# Altium PCB Main_2022-10-17.pcbdoc (part 1 of 2)
Units mil, origin at the board's own origin, x right, y up, seen from the top; angles counter-clockwise.
Board outline 1653.5 x 1653.5 mil, 4 copper layers (Top Layer, Mid-Layer 1, Mid-Layer 2, Bottom Layer); 65 components, 57 nets, 222 pads, 194 vias.
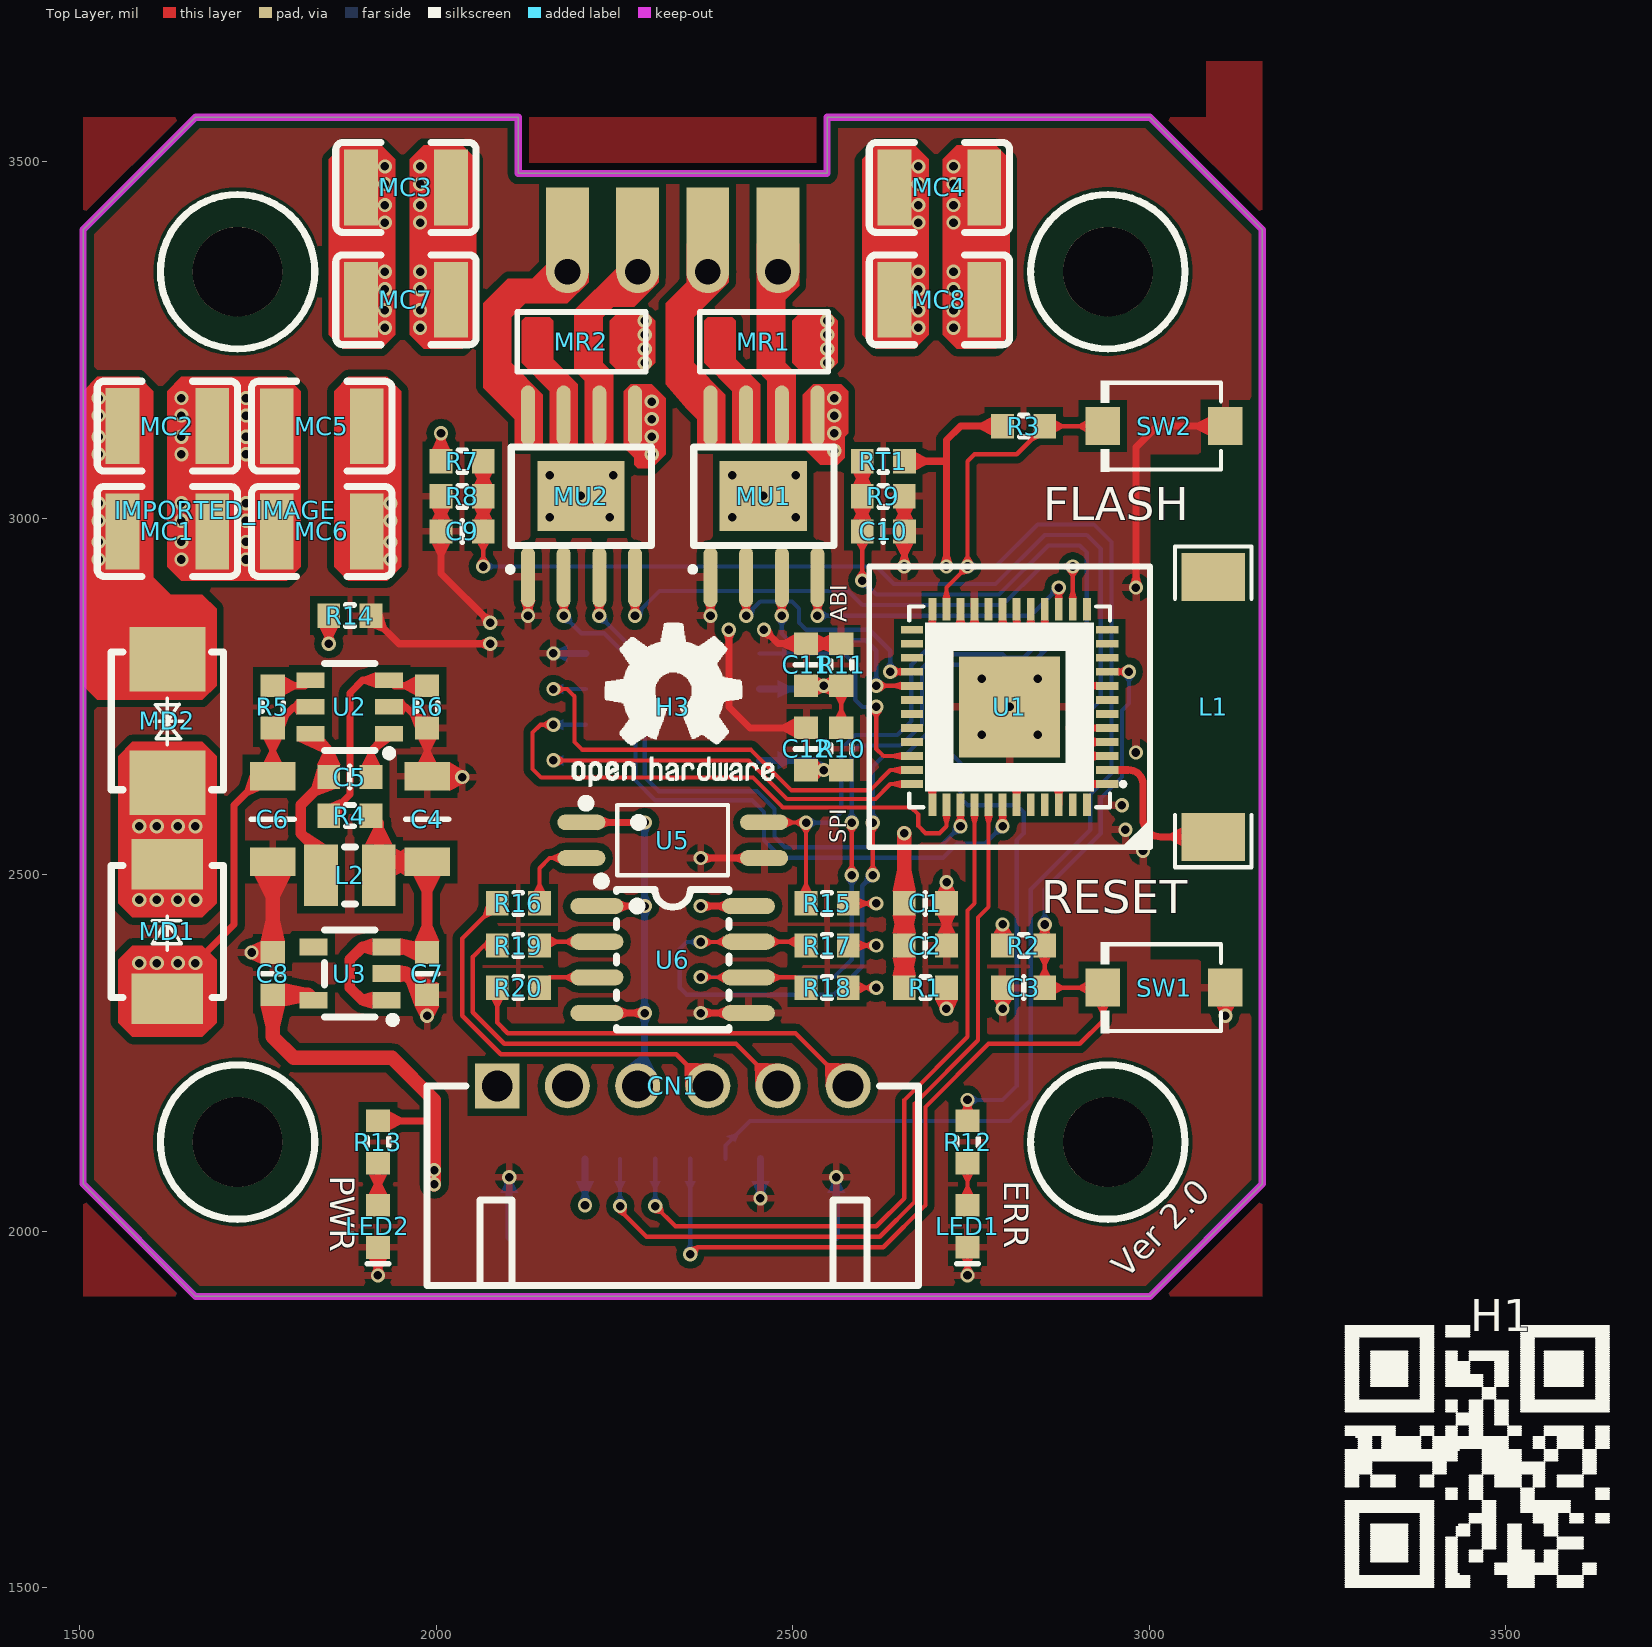
[diagram p0: Top Layer view]
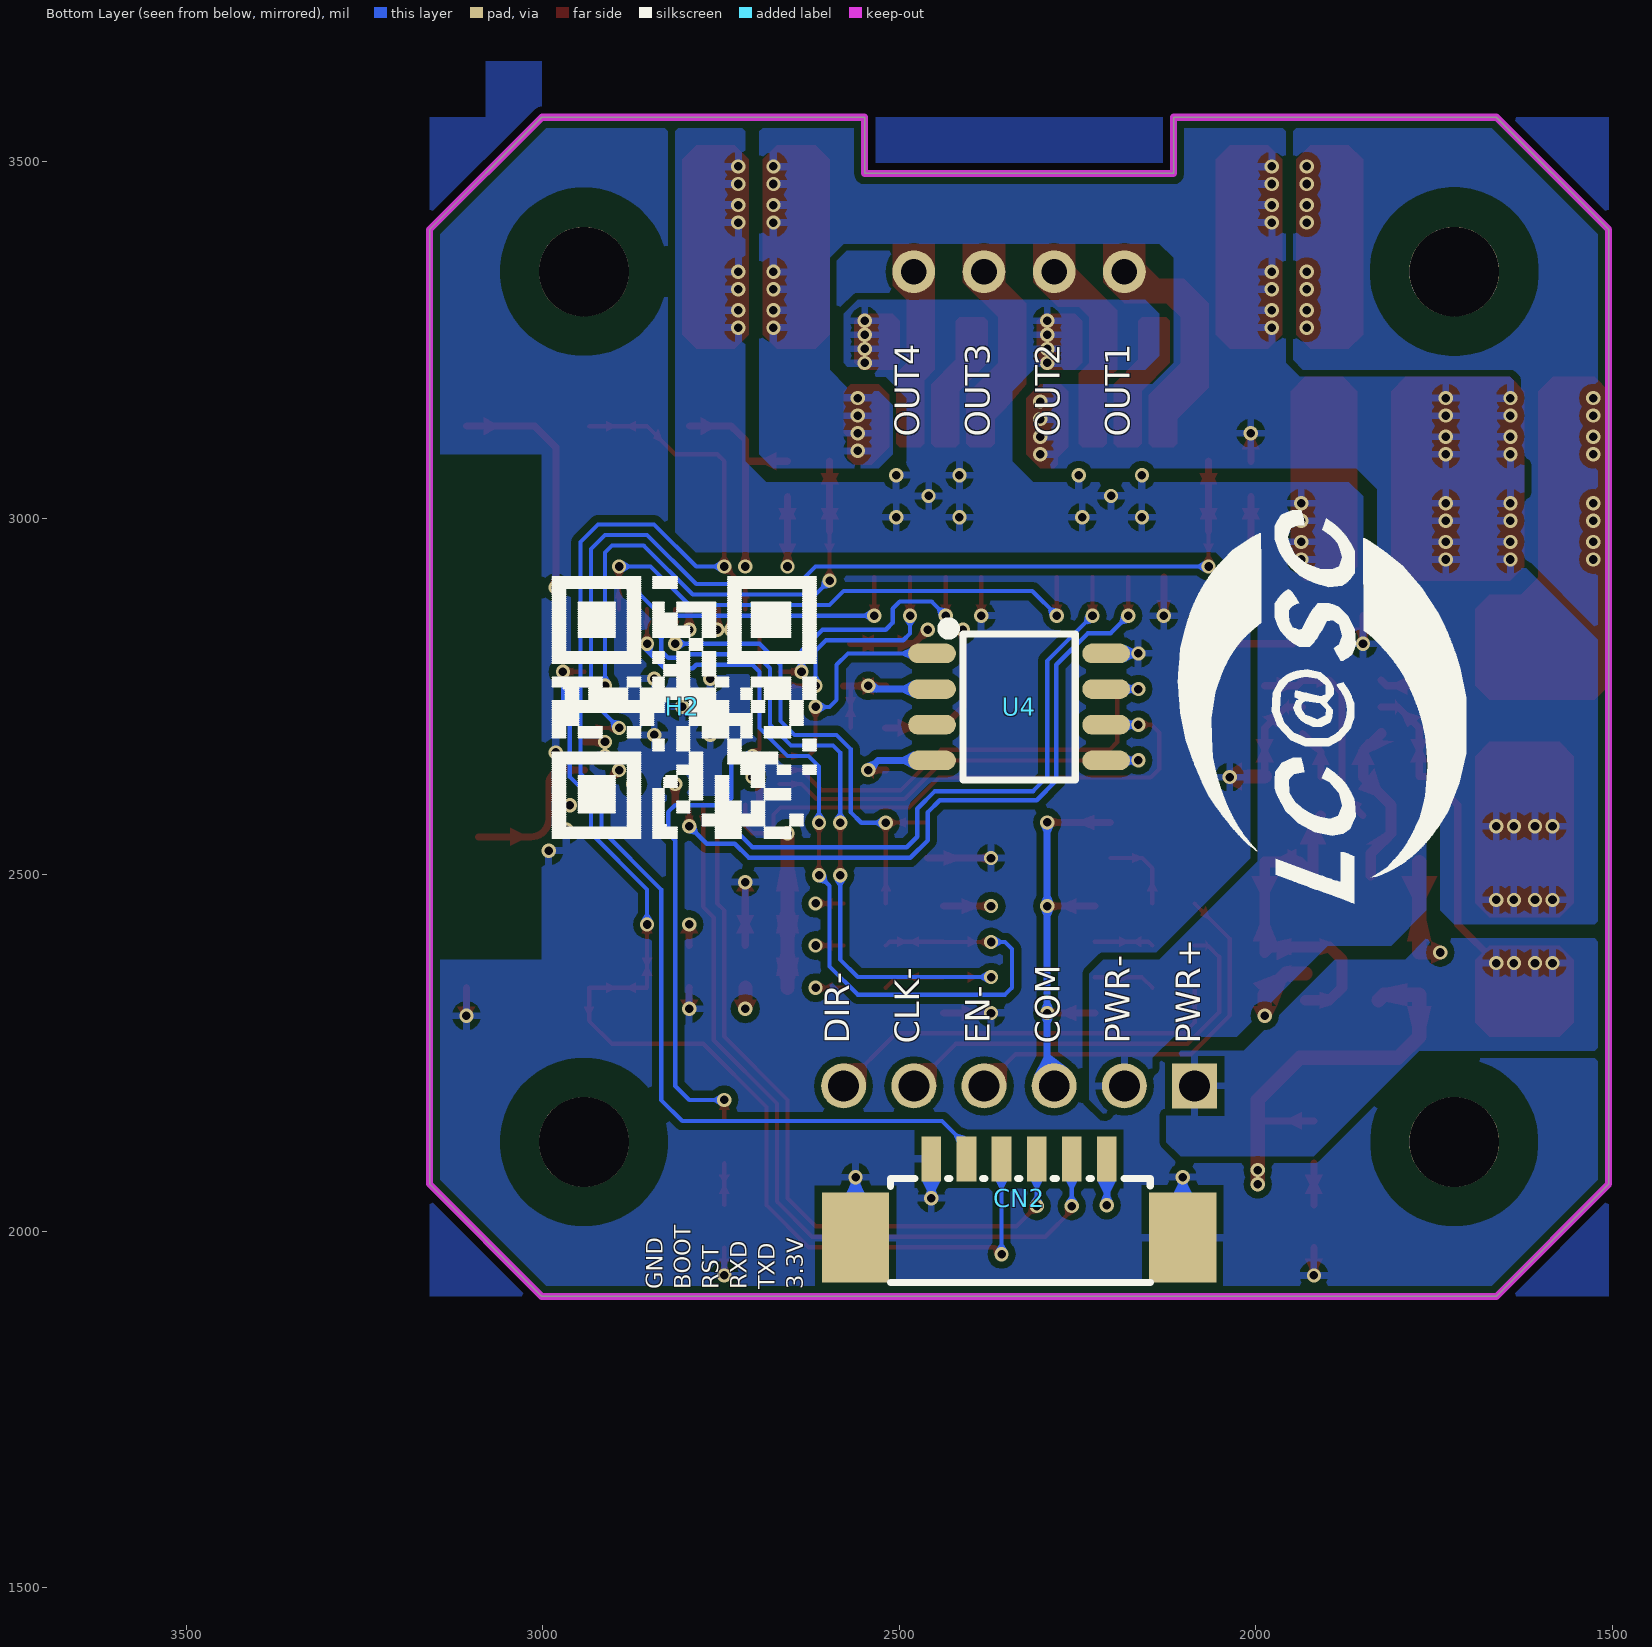
[diagram p1: Bottom Layer view, seen from below]
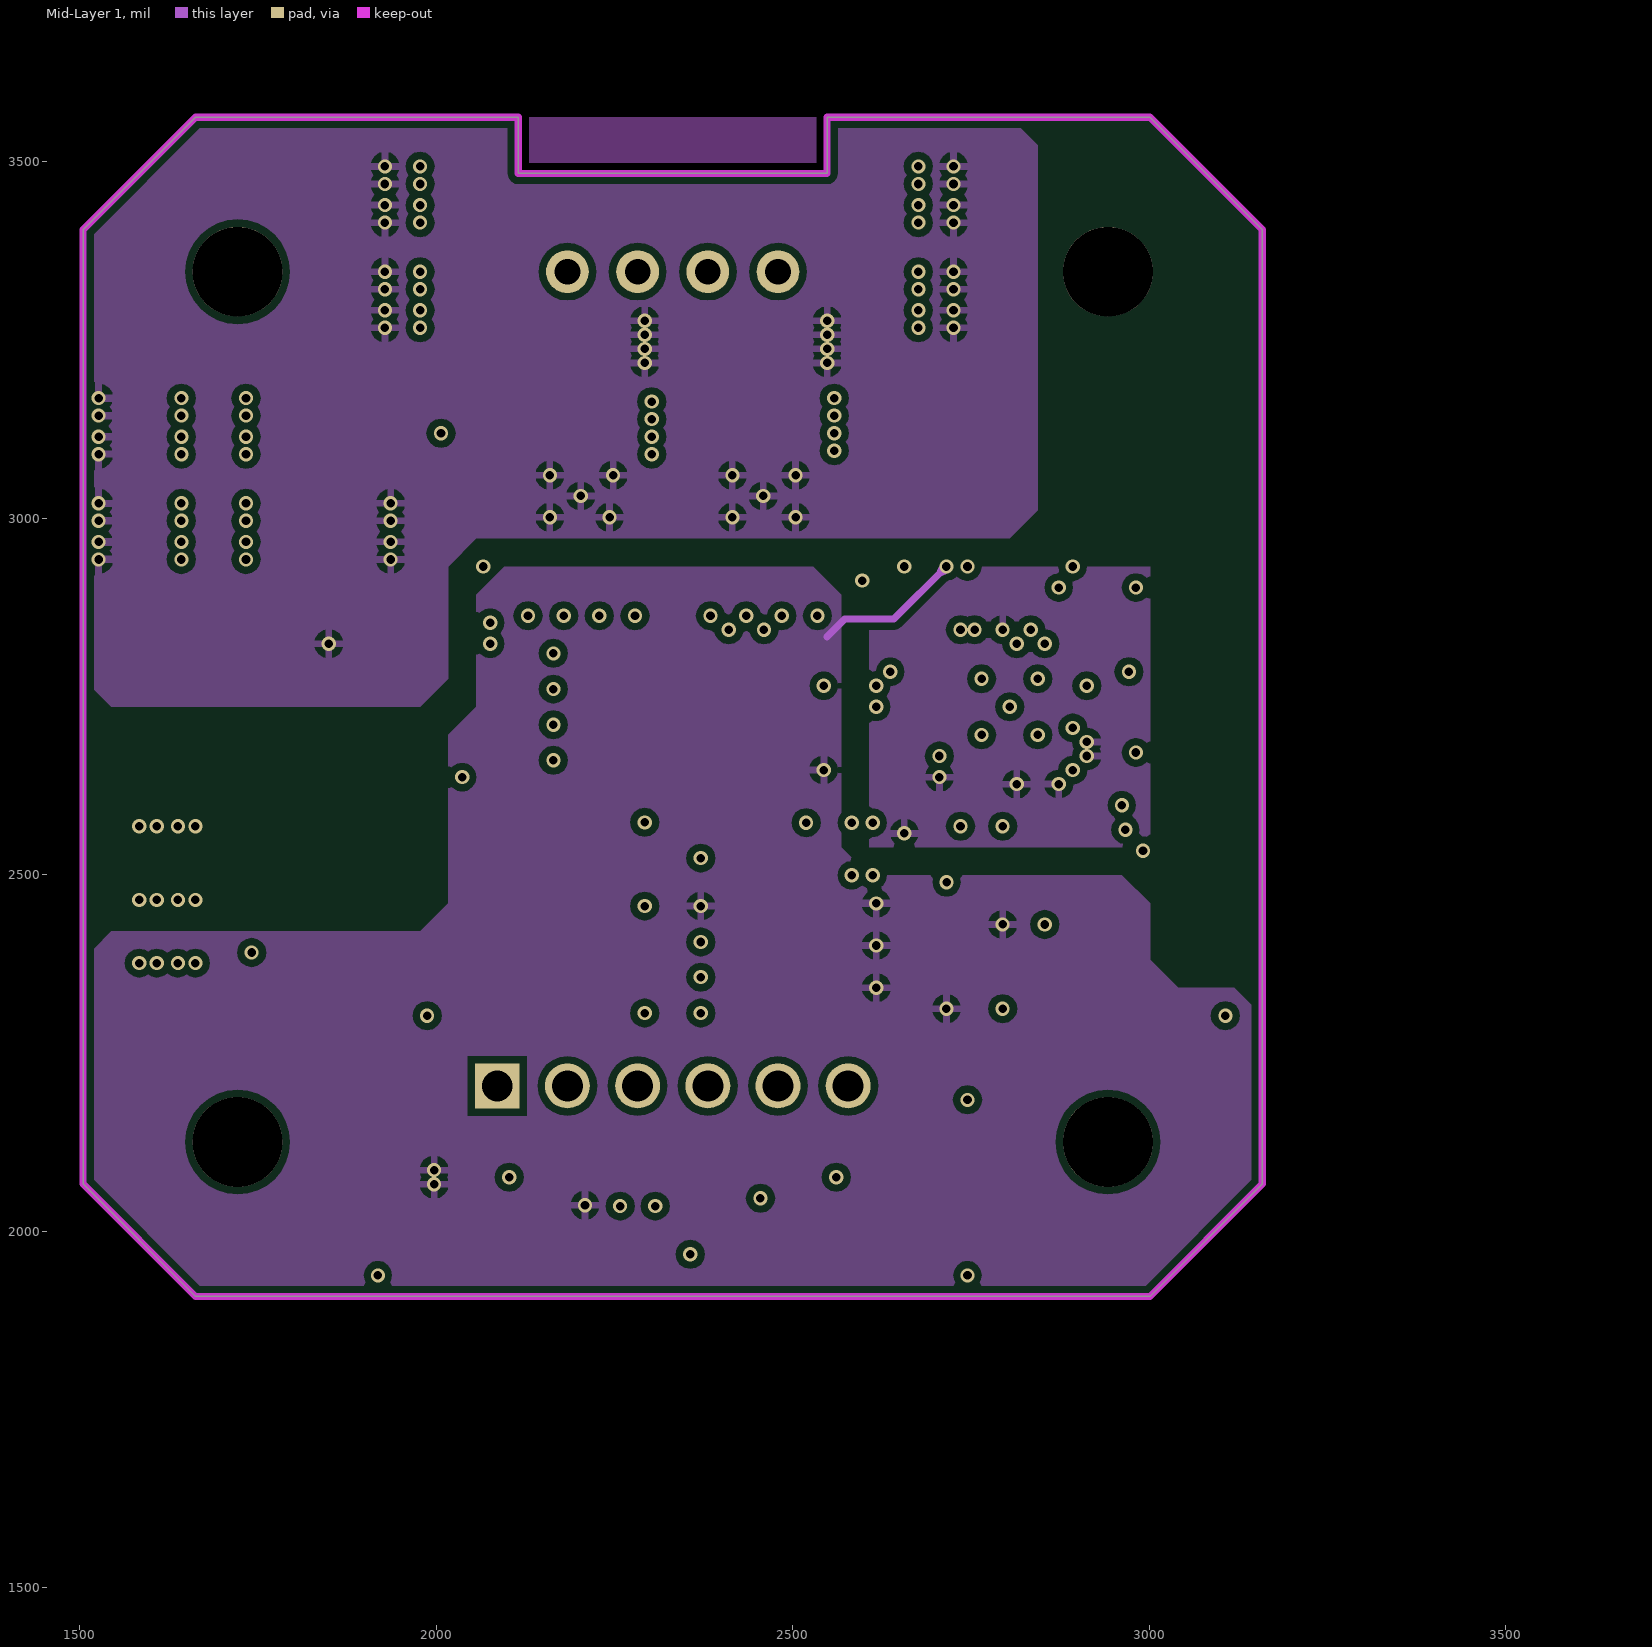
[diagram p2: Mid-Layer 1]
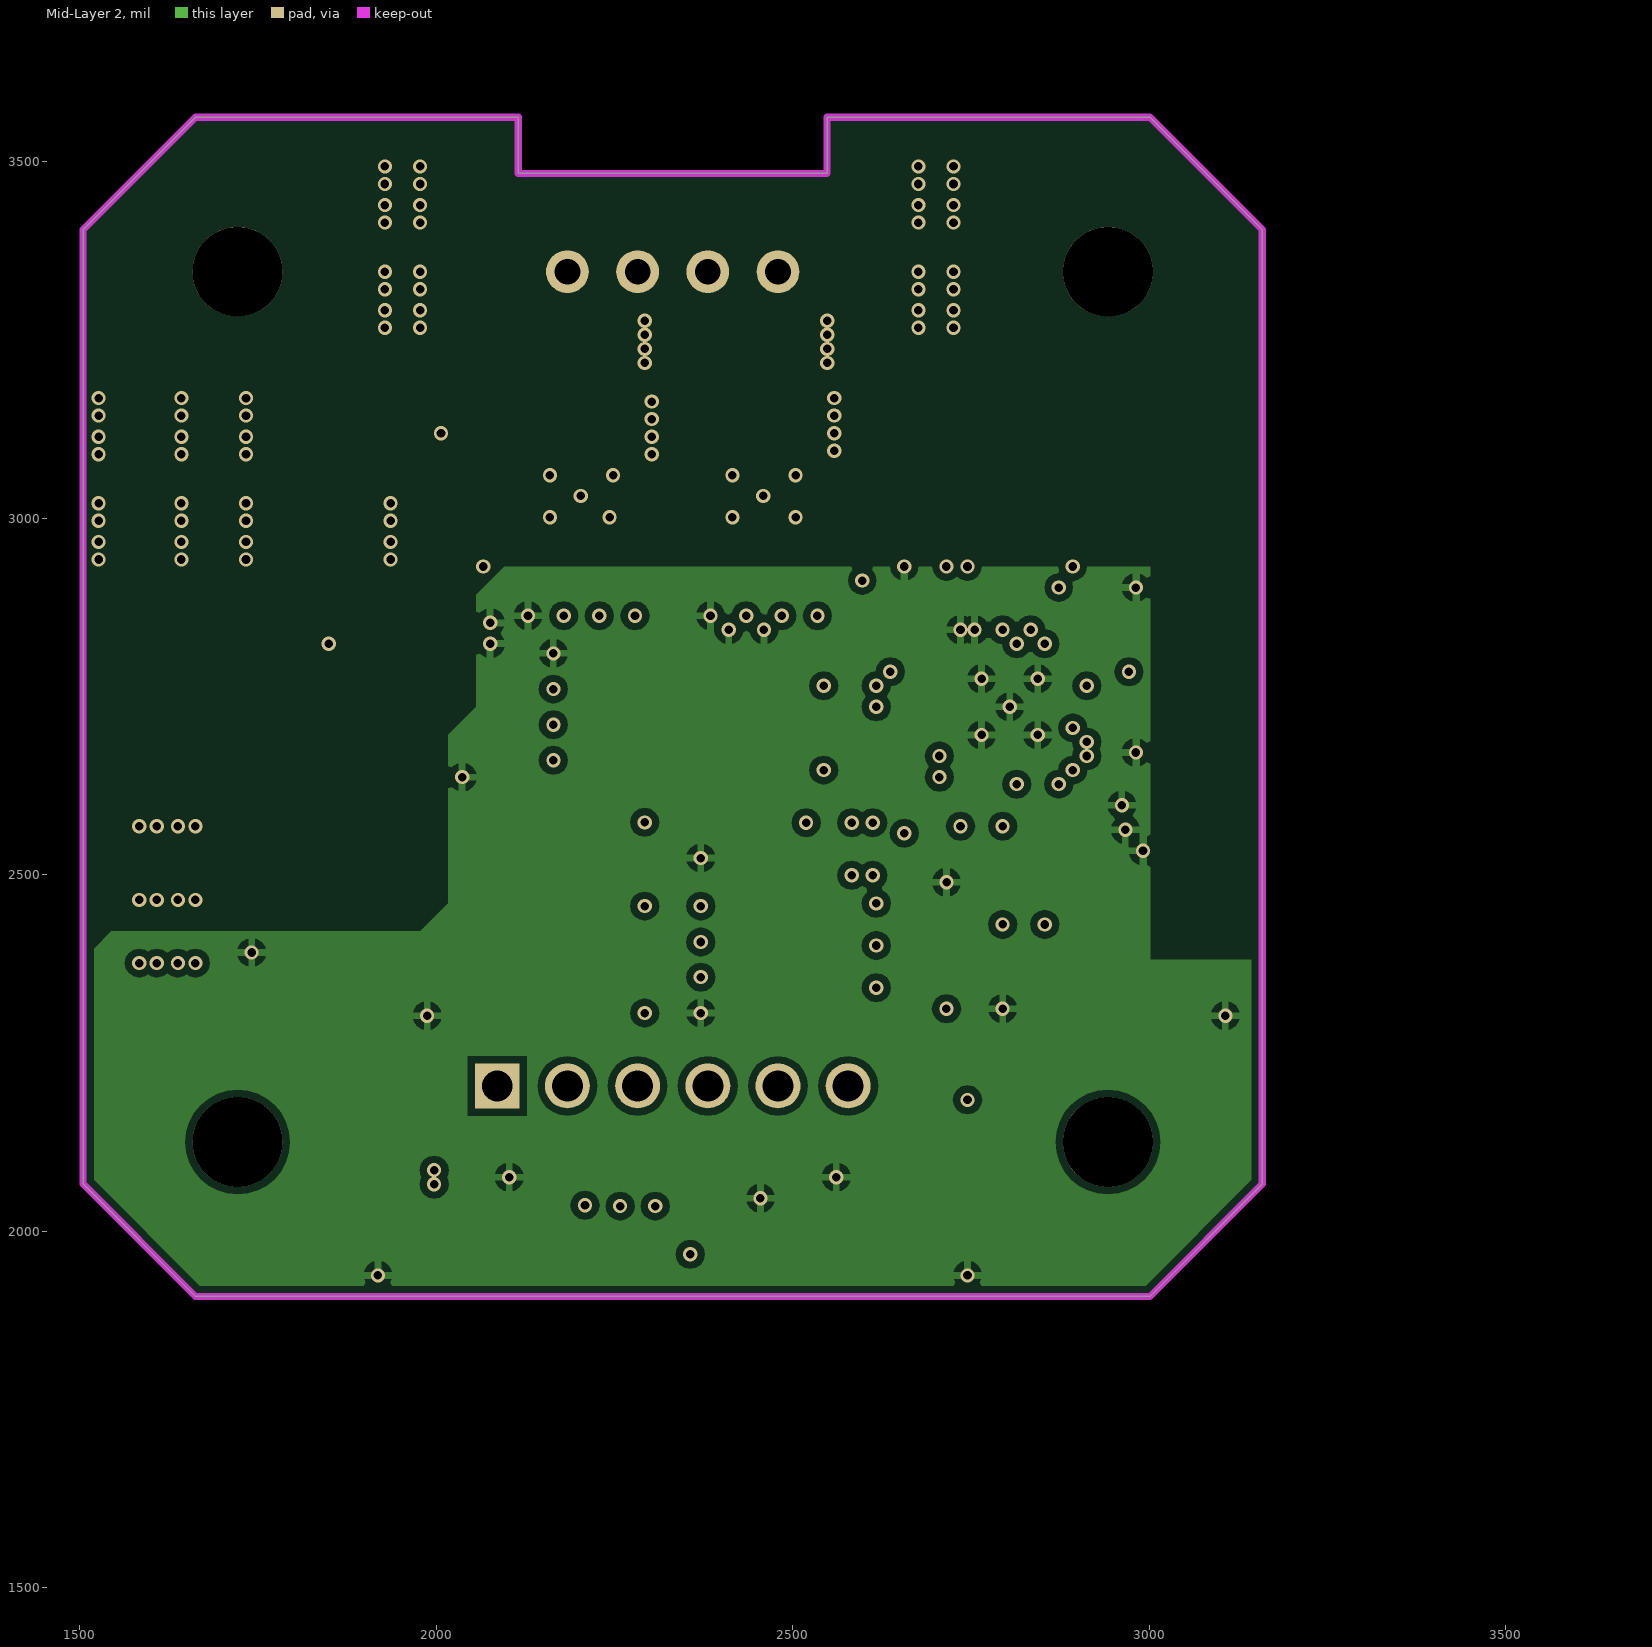
[diagram p3: Mid-Layer 2]

## Layer stack, top to bottom
Top Solder: solder mask 0.4, Solder Resist, Dk 3.5
Top Layer: signal copper 1.4
Dielectric1: dielectric 12.6, FR-4, Dk 4.8
Mid-Layer 1: signal copper 1.4
Dielectric3: dielectric 12.6, FR-4, Dk 4.8
Mid-Layer 2: signal copper 1.4
Dielectric2: dielectric 12.6, FR-4, Dk 4.8
Bottom Layer: signal copper 1.4
Bottom Solder: solder mask 0.4, Solder Resist, Dk 3.5

## Board outline
1505,2066.26 1505,3404.76 1662.5,3562.26 2115.2,3562.26 2115.2,3483.56 2548.3,3483.56 2548.3,3562.26 3001,3562.26 3158.5,3404.76 3158.5,2066.26 3001.1,1908.76 1662.5,1908.76

## Design rules (kind name [scope] priority, off if disabled: settings)
Clearance [All] p1: gap=10 ignorepadtopadclearanceinfootprint=FALSE except(0: Arc-Hole Track-Hole SMDPad-Hole THPad-Hole Via-Hole Fill-Hole Poly-Hole Region-Hole Text-Hole)
PolygonConnect [All] p1: connectstyle=Relief reliefconductorwidth=10 reliefentries=4 polygonreliefangle="90 Angle" airgapwidth=10
RoutingVias [All] p1: holewidth=28 width=50 viastyle="Through Hole" minholewidth=28 minwidth=50 maxholewidth=28 maxwidth=50
SolderMaskExpansion [All] p1: expansion=4
Width [All] p1: maxlimit=10 minlimit=10 preferedwidth=10
30 further rules are at their usual default settings.

## Components (designator, comment, footprint, x,y, rotation, side; value= is the part's Value field where it differs from the comment)
C1 "1u/50V" C0603_SMALL 2686.03,2459.96 r0 top
C2 "100n" C0603_SMALL 2686.03,2400.86 r0 top
C3 "1u/50V" C0603_SMALL 2823.84,2341.76 r0 top
C4 "47u/10V" C1206_SMALL 1987.29,2578.06 r270 top
C5 "100n" C0603_SMALL 1879.04,2637.06 r0 top
C6 "4.7u/50V" C1206_SMALL 1770.69,2578.06 r90 top
C7 "1u/50V" C0603_SMALL 1987.23,2361.46 r90 top
C8 "1u/50V" C0603_SMALL 1770.73,2361.46 r270 top
C9 "1u/50V" C0603_SMALL 2036.43,2981.56 r0 top
C10 "1u/50V" C0603_SMALL 2627.03,2981.56 r180 top
C11 "1u/50V" C0603_SMALL 2518.74,2794.56 r270 top
C12 "100n" C0603_SMALL 2518.76,2676.45 r270 top
CN1 "X8821WR-06S-N0SN" CONN-TH_6P-P2.50_X8821WR-06S-N2SN 2331.74,2203.96 r0 top
CN2 "1.25T-6P-WT" CONN-SMD_6P-P1.25_1.25T-6P-WT 2331.77,2046.5 r0 bottom
H1 "QR" ? 3456.75,1685.5 r0 top
H2 "QR" ? 2804.2,2735.46 r0 bottom
H3 "OSHW" OSHW_LOGO_H8 2331.7,2735.46 r0 top
IMPORTED_IMAGE "Comment" IMPORTED_IMAGE 1704.45,3011.29 r0 top
L1 "AN9520-245" ANT-SMD_L9.5-W2.1 3089.62,2735.5 r90 top
L2 "4.7uH" IND-SMD_L2.5-W2.0 1879,2499.26 r180 top
LED1 "LED-0603_R" LED0603_VIOLET_SMALL 2745.13,2007.15 r90 top
LED2 "LED-0603_B" LED0603_BLUE_SMALL 1918.33,2007.13 r90 top
MC1 "22uF" C1210 1623.09,2981.56 r0 top
MC2 "22uF" C1210 1623.09,3129.2 r0 top
MC3 "22uF" C1210 1957.69,3463.86 r0 top
MC4 "22uF" C1210 2705.8,3463.86 r180 top
MC5 "22uF" C1210 1839.6,3129.16 r180 top
MC6 "22uF" C1210 1839.6,2981.56 r180 top
MC7 "22uF" C1210 1957.69,3306.36 r0 top
MC8 "22uF" C1210 2705.8,3306.36 r180 top
MD1 "SS54" SMB_L4.6-W3.6-LS5.3-R-RD 1623.08,2420.56 r270 top
MD2 "SMBJ30CA" SMB_L4.6-W3.6-LS5.3-BI 1623.1,2715.79 r90 top
MR1 "0R10" R1206 2459.69,3247.36 r180 top
MR2 "0R10" R1206 2203.79,3247.36 r180 top
MU1 "A4950" HSOP-8_L5.0-W4.0-P1.27-LS6.2-TL-EP 2459.7,3030.78 r90 top
MU2 "A4950" HSOP-8_L5.0-W4.0-P1.27-LS6.2-TL-EP 2203.79,3030.78 r90 top
R1 "0R" R0603_SMALL 2686.1,2341.76 r180 top
R2 "10k" R0603_SMALL 2823.9,2400.86 r0 top
R3 "10k" R0603_SMALL 2823.9,3129.16 r0 top
R4 "52.3k" R0603_SMALL 1879,2582.96 r180 top
R5 "10k" R0603_SMALL 1770.7,2735.46 r90 top
R6 "10k" R0603_SMALL 1987.3,2735.46 r270 top
R7 "10k" R0603_SMALL 2036.5,3079.96 r0 top
R8 "1k" R0603_SMALL 2036.5,3030.76 r180 top
R9 "1k" R0603_SMALL 2627,3030.76 r0 top
R10 "0R" R0603_SMALL 2568,2676.46 r90 top
R11 "0R" R0603_SMALL 2568,2794.56 r90 top
R12 "1k" R0603_SMALL 2745.13,2125.26 r270 top
R13 "1k" R0603_SMALL 1918.36,2125.26 r270 top
R14 "0R" R0603_SMALL 1879,2863.46 r0 top
R15 "1k" R0603_SMALL 2548.3,2459.96 r180 top
R16 "390" R0603_SMALL 2115.2,2459.96 r180 top
R17 "1k" R0603_SMALL 2548.3,2400.86 r180 top
R18 "1k" R0603_SMALL 2548.3,2341.76 r180 top
R19 "390" R0603_SMALL 2115.2,2400.86 r180 top
R20 "390" R0603_SMALL 2115.2,2341.76 r180 top
RT1 "10k" R0603_SMALL 2627.02,3079.99 r0 top
SW1 "TS-1088R-02026" SW-SMD_L3.9-W3.0-P4.45 3020.72,2341.8 r180 top
SW2 "TS-1088R-02026" SW-SMD_L3.9-W3.0-P4.45 3020.72,3129.2 r180 top
U1 "ESP32-PICO-D4" QFN-48_L7.0-W7.0-P0.50-BL-EP5.1 2804.2,2735.46 r90 top
U2 "JW5026" SOT-23-6_L2.9-W1.6-P0.95-LS2.8-BR 1878.99,2735.5 r0 top
U3 "XC6210B332MR" SOT-23-5_L3.0-W1.7-P0.95-LS2.8-BR 1878.99,2361.48 r0 top
U4 "MT6816CT-AKD" SOP-8_L5.0-W4.0-P1.27-LS6.2-BL 2331.7,2735.46 r90 bottom
U5 "EL3H7(B)(TA)-G" SOP-4_L4.4-W2.8-P1.27-LS7.0-TL 2331.73,2548.53 r0 top
U6 "TLP2168(TP,F)" SO-8_L4.9-W3.9-P1.27-LS5.9-BL 2331.7,2381.16 r270 top

## Footprints (in the part's own frame and the unit in brackets; to place one, negate y for a bottom-side part, rotate by r counter-clockwise, add the part's x,y. Pads: shape width x height; smd on the part's side, far side on the other; paste and mask are expansions set on the pad)
ANT-SMD_L9.5-W2.1 [mm]
  rect 1.71x2.268 smd: 1(-4.63,0) 2(4.63,0)
  silkscreen extent -5.71,-1.36 5.71,1.36
C0603_SMALL [mil]
  rect 31.75x34.02 smd: 1(-29.65,0) 2(29.66,0)
  silkscreen extent 0,-15 0,15
C1206_SMALL [mil]
  rect 40x64 smd: 1(-60,0) 2(60,0)
  silkscreen extent 0,-30 0,30
C1210 [mm]
  rect 1.2x2.7 smd: 1(-1.6,0) 2(1.6,0)
  silkscreen extent -2.5,-1.6 2.5,1.6
CONN-SMD_6P-P1.25_1.25T-6P-WT [mm]
  rect 0.7x1.6 smd: 1(-3.125,-1.398) 2(-1.875,-1.398) 3(-0.625,-1.399) 4(0.625,-1.401) 5(1.875,-1.401) 6(3.125,-1.402)
  rect 2.4x3.2 smd: 7(5.825,1.402) 8(-5.825,1.401)
  silkscreen extent -4.67,-0.7 4.58,3
CONN-TH_6P-P2.50_X8821WR-06S-N2SN [mm]
  rect 1.6x1.6 hole 1.1: 1(-6.25,0)
  round 1.6 hole 1.1: 2(-3.75,0) 3(-1.25,0) 4(1.25,0) 5(3.75,0) 6(6.25,0)
  silkscreen extent -8.75,-7.11 8.75,0
HSOP-8_L5.0-W4.0-P1.27-LS6.2-TL-EP [mm]
  oval 2.15x0.5 smd: 1(-2.875,1.905) 2(-2.875,0.635) 3(-2.875,-0.635) 4(-2.875,-1.905) 5(2.875,-1.905) 6(2.875,-0.635) 7(2.875,0.635) 8(2.875,1.905)
  rect 2.5x3.1 smd: 9(0.013,0.025)
  silkscreen extent -2.67,-2.5 1.75,2.6
IMPORTED_IMAGE [mil]
IND-SMD_L2.5-W2.0 [mm]
  rect 1.2x2.2 smd: 1(1.028,0) 2(-1.028,0)
  silkscreen extent -0.2,-1.02 0.2,1.02
LED0603_BLUE_SMALL [mil]
  rect 31.75x34.02 smd: 1(29.66,0) 2(-29.65,0)
  silkscreen extent -52,-15 -52,15
LED0603_VIOLET_SMALL [mil]
  rect 31.75x34.02 smd: 1(29.66,0) 2(-29.65,0)
  silkscreen extent -53,-15 -53,15
OSHW_LOGO_H8 [mil]
  silkscreen extent -142,-111 142,118
QFN-48_L7.0-W7.0-P0.50-BL-EP5.1 [mm]
  rect 0.28x0.8 smd: 1(-2.75,-3.478) 2(-2.25,-3.478) 3(-1.75,-3.478) 4(-1.25,-3.478) 5(-0.75,-3.478) 6(-0.25,-3.478) 7(0.25,-3.478) 8(0.75,-3.478) 9(1.25,-3.478) 10(1.75,-3.478) 11(2.25,-3.478) 12(2.75,-3.478) 25(2.75,3.478) 26(2.25,3.478) 27(1.75,3.478) 28(1.25,3.478) 29(0.75,3.478) 30(0.25,3.478) 31(-0.25,3.478) 32(-0.75,3.478) 33(-1.25,3.478) 34(-1.75,3.478) 35(-2.25,3.478) 36(-2.75,3.478)
  rect 0.8x0.28 smd: 13(3.478,-2.75) 14(3.478,-2.25) 15(3.478,-1.75) 16(3.478,-1.25) 17(3.478,-0.75) 18(3.478,-0.25) 19(3.478,0.25) 20(3.478,0.75) 21(3.478,1.25) 22(3.478,1.75) 23(3.478,2.25) 24(3.478,2.75) 37(-3.478,2.75) 38(-3.478,2.25) 39(-3.478,1.75) 40(-3.478,1.25) 41(-3.478,0.75) 42(-3.478,0.25) 43(-3.478,-0.25) 44(-3.478,-0.75) 45(-3.478,-1.25) 46(-3.478,-1.75) 47(-3.478,-2.25) 48(-3.478,-2.75)
  rect 3.6x3.6 smd: 49(0,0)
  silkscreen extent -3.58,-4.12 3.58,3.58
R0603_SMALL [mil]
  rect 31.75x34.02 smd: 1(-29.66,0) 2(29.65,0)
  silkscreen extent -6,-15 6,15
R1206 [mil]
  Top Layer region: -80,27 -75,32 -45,32 -40,27 -40,-27 -45,-32 -75,-32 -80,-27
  Top Layer region: 40,27 45,32 75,32 80,27 80,-27 75,-32 45,-32 40,-27
  silkscreen extent -90,-42 90,42
SMB_L4.6-W3.6-LS5.3-BI [mm]
  rect 2.3x2.7 smd: 1(-2.2,0) 2(2.2,0)
  silkscreen extent -2.45,-2 2.45,2
SMB_L4.6-W3.6-LS5.3-R-RD [mm]
  rect 1.8x2.54 smd: 1(2.4,0) 2(-2.4,0)
  silkscreen extent -2.35,-2 2.35,2
SO-8_L4.9-W3.9-P1.27-LS5.9-BL [mil]
  oval 22.6x74.33 smd: 1(-75,-106.26) 2(-25,-106.26) 3(25,-106.26) 4(75,-106.26) 5(75,106.26) 6(25,106.26) 7(-25,106.26) 8(-75,106.26)
  silkscreen extent -116,-106 98,79
SOP-4_L4.4-W2.8-P1.27-LS7.0-TL [mm]
  oval 1.71x0.56 smd: 1(-3.255,0.635) 2(-3.255,-0.635) 3(3.255,-0.635) 4(3.255,0.635)
  silkscreen extent -3.24,-1.25 1.97,1.47
SOP-8_L5.0-W4.0-P1.27-LS6.2-BL [mm]
  oval 0.7x1.7 smd: 1(1.905,3.1) 2(0.635,3.1) 3(-0.635,3.1) 4(-1.905,3.1) 5(-1.905,-3.1) 6(-0.635,-3.1) 7(0.635,-3.1) 8(1.905,-3.1)
  silkscreen extent -2.6,-2 2.99,2.71
SOT-23-5_L3.0-W1.7-P0.95-LS2.8-BR [mm]
  rect 1x0.6 smd: 1(1.3,-0.95) 2(1.3,0) 3(1.3,0.95) 4(-1.3,0.95) 5(-1.3,-0.95)
  silkscreen extent -0.9,-1.78 1.65,1.55
SOT-23-6_L2.9-W1.6-P0.95-LS2.8-BR [mm]
  rect 1x0.55 smd: 1(1.4,-0.95) 2(1.4,0) 3(1.4,0.95) 4(-1.4,0.95) 5(-1.4,0) 6(-1.4,-0.95)
  silkscreen extent -0.9,-1.78 1.52,1.55
SW-SMD_L3.9-W3.0-P4.45 [mm]
  rect 1.23x1.36 smd: 1(-2.185,0) 2(2.185,0)
  silkscreen extent -2.03,-1.62 2.25,1.62
? [mil]
  silkscreen extent -182,-184 188,182

## Free pads (board coordinates)
  round 60 hole 36: 1(2184.11,3345.74) 2(2282.53,3345.74) 3(2380.96,3345.74) 4(2479.39,3345.74)
  rect 60x118.11 smd: 5(2184.11,3404.79) 5(2282.53,3404.79) 5(2380.96,3404.79) 5(2479.39,3404.79)
  round 125.98 hole 125.98 unplated: ""(1721.51,2125.26) ""(1721.51,3345.74) ""(2941.99,2125.26) ""(2941.99,3345.74)

## Via types
v1: diameter 20, hole 12, Top Layer to Bottom Layer, tented both sides, 194 vias

## Nets (pads, with @x,y where several pads share a name; then routed paths per layer and width w, separated by ;. In a path a pad name is that pad's centre, name@x,y a point inside that pad or via, vN(x,y) a via of type N, cw(c..) or ccw(c..) an arc to the next point about the centre after c; other vN are vias at no path point)
3.3V: C8.2 C12.2 CN2.1 R1.1 R2.1 R3.1 R10.1 R13.1 R15.1 R17.1 R18.1 RT1.2 U3.5 U4.4 U6.8 | length 1538.9
  Top Layer w6: R18.1@2577.9,2341.76 v1(2617.2,2341.76) ; R17.1@2577.9,2400.86 v1(2617.2,2400.86) ; R15.1@2577.9,2459.86 v1(2617.2,2459.86)
  Top Layer w10: R13.1@1918.4,2154.96 1997.1,2154.96 ; v1(2371.12,2456.18) U6.8@2437.96,2456.16 ; C12.2@2518.76,2646.79 2519,2646.96 v1@2543.4,2646.96 ; RT1.2@2656.68,3079.99 2715.6,3079.96 ; v1@2715.6,2932.36 2715.6,3079.96 ; R2.1@2794.24,2400.86 2794.4,2400.96 v1(2794.35,2430.38) ; R3.1@2794.24,3129.16 2735.3,3129.16 2715.6,3109.56 2715.6,3079.96
  Top Layer w19.68: v1(2715.61,2312.27) 2715.7,2312.36 R1.1@2715.7,2341.76
  Top Layer w20: U3.5@1827.81,2324.09 1820.1,2331.86 1770.7,2331.86 1770.7,2272.86 1800.3,2243.36 1938,2243.36 1997.1,2184.26 v1(1997.1,2085.9) ; v1(1997.1,2066.21) v1(1997.1,2085.9)
  Mid-Layer 1 w10: 2548.28,2833.92 2572.89,2858.53 2641.79,2858.53 v1(2715.61,2932.35)
  Bottom Layer w10: v1(2208.72,2036.68) CN2.1@2208.7,2101.56 ; U4.4@2453.8,2660.46 2529.8,2660.46 v1@2543.4,2646.96
  other v1: 2543.36,2646.92
3.3V_ESP: C1.1 C2.1 R1.2 U1.1 U1.3 U1.4 U1.19 U1.37 U1.43 U1.46 | length 459
  Top Layer w10: U1.37@2695.9,2598.56 2695.9,2627.26 v1(2705.77,2637.07) ; v1(2794.35,2843.77) U1.19@2794.36,2872.37 ; U1.43@2814,2598.56 v1@2814,2627.26 ; U1.46@2873.1,2598.56 v1(2873.1,2627.26) ; v1@2892.8,2646.96 2912.5,2627.26 U1.1@2941.1,2627.26 ; v1(2912.46,2666.6) U1.3@2941.11,2666.56 ; v1(2912.46,2686.29) U1.4@2941.1,2686.26
  Top Layer w20: R1.2@2656.45,2341.76 C2.1@2656.38,2400.86 2656.4,2558.26 v1@2656.6,2558.36
  other v1: 2656.55,2558.34 2814.03,2627.23 2892.77,2646.92
5V: C4.2 C7.2 L2.2 R4.1 U3.1 U3.3 | length 507.5
  Top Layer w15: R4.1@1908.6,2582.96 1919.5,2572.16 L2.2@1919.47,2499.26 1938.2,2518.06 C4.2@1987.29,2518.05 1987.3,2391.16 1979.5,2398.86 U3.3@1930.17,2398.88 1896.7,2398.86 1879,2381.16 1879,2341.76 1896.7,2324.06 U3.1@1930.17,2324.08
C11_2: C11.2 R10.2 R11.1 U4.2 | length 209.5
  Top Layer w5.98: R10.2@2568,2706.11 R11.1@2568,2765.06
  Top Layer w10: C11.2@2518.8,2764.86 R11.1@2577.8,2764.86
  Bottom Layer w10: U4.2@2453.8,2760.46 2538.8,2760.46 v1@2543.4,2765.06
  other v1: 2543.36,2765.03
CLK-: CN1.5 R19.2 | length 589.6
  Top Layer w6: R19.2@2085.6,2400.86 2067.1,2400.86 2051.2,2384.96 2051.2,2307.36 2095.5,2263.06 2420.4,2263.06 CN1.5@2479.4,2204.06
CLKIN: R17.2 U1.16 U6.7 | length 1217.1
  Top Layer w5.98: v1(2371.1,2405.76) U6.7@2437.96,2406.16 ; v1(2612.26,2499.28) v1(2612.3,2573.06)
  Top Layer w6: U6.7@2437.96,2406.16 2513.3,2406.16 R17.2@2518.64,2400.86 ; v1(2853.4,2824.06) U1.16@2853.41,2872.37
  Bottom Layer w5.98: v1(2371.1,2405.76) 2351.4,2405.76 2341.6,2395.96 2341.6,2341.76 2351.4,2331.96 2558.1,2331.96 2597.5,2371.36 2597.5,2484.56 v1(2612.26,2499.28) ; v1(2612.3,2573.06) 2612.3,2651.86 2627,2666.56 2656.6,2666.56 2695.9,2705.96 2695.9,2784.76 2705.8,2794.56 2784.5,2794.56 2789.4,2789.66 2828.8,2789.66 2853.4,2814.26 v1(2853.4,2824.06)
COM: CN1.3 U5.1 U6.1 U6.4 | length 596.2
  Top Layer w10: U5.1@2203.58,2573.53 v1(2292.38,2573.5) ; U6.4@2225.5,2306.16 v1(2292.38,2306.18) ; U6.1@2225.5,2456.16 v1(2292.38,2456.18)
  Bottom Layer w10: CN1.3@2282.52,2203.96 2292.38,2213.86 v1(2292.38,2573.5)
CSQ: U1.34 U4.1 | length 336.5
  Top Layer w6: v1(2617.18,2735.5) 2617.2,2676.46 2627.1,2666.56 U1.34@2667.29,2666.56
  Bottom Layer w6: U4.1@2453.8,2810.46 2571.7,2810.46 2587.7,2794.56 2587.7,2745.36 2597.5,2735.46 v1(2617.18,2735.5)
DAC1: MU2.4 U1.14 | length 772.8
  Top Layer w6: v1@2278.8,2863.46 MU2.4@2278.79,2917.58 ; U1.14@2892.78,2872.37 v1@2892.8,2932.36
  Bottom Layer w6: v1@2278.8,2863.46 2313.3,2897.86 2577.8,2897.86 2597.5,2878.26 2794.3,2878.26 2848.5,2932.36 v1@2892.8,2932.36
  other v1: 2278.81,2863.45 2892.77,2932.35
DAC2: MU1.4 U1.15 | length 439.3
  Top Layer w6: v1@2534.7,2863.46 MU1.4@2534.7,2917.58 ; U1.15@2873.1,2872.37 v1@2873.1,2902.86
  Bottom Layer w6: v1(2534.7,2863.45) 2833.72,2863.45 v1(2873.09,2902.82)
DIR-: CN1.6 R20.2 | length 577.9
  Top Layer w6: R20.2@2085.6,2341.76 2085.6,2292.76 2100.5,2277.86 2504,2277.86 CN1.6@2577.8,2204.06
DIRIN: R18.2 U1.17 U6.6 | length 1084.2
  Top Layer w5.98: v1(2371.1,2356.56) U6.6@2437.96,2356.16 ; v1(2582.73,2499.28) v1(2582.7,2573.06)
  Top Layer w6: U6.6@2437.96,2356.16 2504.3,2356.16 R18.2@2518.64,2341.76 ; v1(2833.72,2843.77) U1.17@2833.73,2872.37
  Bottom Layer w5.98: v1(2371.1,2356.56) 2558.12,2356.56 2582.73,2381.16 v1(2582.73,2499.28) ; v1(2582.7,2573.06) 2582.7,2671.56 2592.6,2681.36 2651.6,2681.36 2681.2,2710.86 2681.2,2789.66 2700.8,2809.36 2794.3,2809.36 2799.3,2804.36 2823.9,2804.36 2833.7,2814.26 v1(2833.72,2843.77)
EN-: CN1.4 R16.2 | length 563
  Top Layer w6: R16.2@2085.6,2459.86 2036.5,2410.76 2036.5,2302.46 2090.6,2248.26 2336.8,2248.26 CN1.4@2381,2204.06
ENIN: R15.2 U1.18 U5.4 | length 717.8
  Top Layer w5.98: U5.4@2459.88,2573.53 2518.6,2573.46 R15.2@2518.6,2459.86
  Top Layer w6: v1(2814.03,2824.08) U1.18@2814.04,2872.37
  Bottom Layer w5.98: v1(2518.76,2573.1) 2553.2,2573.06 2568,2587.86 2568,2676.46 2587.7,2696.16 2646.7,2696.16 2666.4,2715.86 2666.4,2794.56 2695.92,2824.08 v1(2814.03,2824.08)
ESP_BOOT: CN2.5 R3.2 SW2.2 U1.23 | length 1968.9
  Top Layer w6: U1.23@2715.62,2872.37 2715.6,2902.86 v1(2745.1,2932.36) 2745.1,3079.96 2755,3089.86 2814.2,3089.86 2853.5,3129.16 SW2.2@2934.7,3129.2
  Bottom Layer w5.98: CN2.5@2405.59,2101.66 2405.6,2120.36 2440,2154.76 2804.2,2154.76 2833.7,2184.26 2833.7,2479.56 2917.4,2563.26 2917.4,2612.46 2946.9,2641.96 2946.9,2966.76 2922.3,2991.36 2843.6,2991.36 2784.5,2932.36 v1(2745.1,2932.36)
ESP_RST: C3.2 CN2.4 R2.2 SW1.2 U1.9 | length 1578.6
  Top Layer w6: v1(2356.36,1967.78) 2366.2,1977.66 2627,1977.66 2686.1,2036.76 2686.1,2174.46 2774.7,2263.06 2902.6,2263.06 2934.7,2295.16 SW1.2@2934.7,2341.8 C3.2@2853.49,2341.76 2853.5,2400.86 v1(2853.4,2430.36) ; U1.9@2941.11,2784.67 v1(2971.5,2784.76)
  Bottom Layer w6: v1(2356.36,1967.78) CN2.4@2356.4,2101.66 ; v1(2853.4,2430.36) 2853.4,2479.56 2932.1,2558.36 2932.1,2607.56 2961.7,2637.06 2961.7,2730.56 2971.5,2740.36 v1(2971.5,2784.76)
ESP_UART0_RXD: CN2.3 U1.40 | length 1036.5
  Top Layer w6: v1(2307.14,2035.5) 2335.5,2007.16 2617.2,2007.16 2656.6,2046.56 2656.6,2184.36 2745.1,2272.86 2745.1,2450.06 2755,2459.96 U1.40@2755,2598.56
  Bottom Layer w6: v1(2307.14,2035.5) CN2.3@2307.1,2101.66
ESP_UART0_TXD: CN2.2 U1.41 | length 1120.5
  Top Layer w6: v1@2258.1,2035.36 2258.1,2029.36 2295,1992.46 2622.1,1992.46 2671.3,2041.66 2671.3,2179.36 2759.9,2267.96 2759.9,2440.26 2774.7,2455.06 U1.41@2774.7,2598.36
  Bottom Layer w6: v1(2257.93,2035.5) CN2.2@2257.9,2101.56
FET_TEMP: C10.2 R9.1 RT1.1 U1.8 | length 738.7
  Top Layer w6: C10.2@2597.38,2981.56 2597.5,2981.46 v1(2597.5,2912.66) ; v1@2912.5,2765.06 U1.8@2941.1,2765.06
  Top Layer w10: C10.2@2597.38,2981.56 RT1.1@2597.37,3079.99
  Bottom Layer w6: v1(2597.5,2912.66) 2617.2,2892.96 2789.4,2892.96 2858.3,2961.86 2902.6,2961.86 2912.5,2952.06 v1@2912.5,2765.06
  other v1: 2912.46,2765.03
GND: C1.2 C2.2 C3.1 C4.1 C6.1 C7.1 C8.1 C9.1 C10.1 C11.1 C12.1 CN2.6 CN2.7 CN2.8 LED1.2 LED2.2 MU1.1 MU2.1 R6.2 R8.2 R9.2 R11.2 R14.2 SW1.1 SW2.1 U1.21 U1.22 U1.49 U2.2 U3.2 U4.8 U5.3 U6.5 | length 2431.7
  Top Layer w6: v1@2384.7,2863.46 MU1.1@2384.7,2917.58 ; v1(2745.1,1938.26) LED1.2@2745.13,1977.5
  Top Layer w10: R14.2@1908.6,2863.46 1948,2824.06 v1(2075.84,2824.08) ; v1(1918.36,1938.26) LED2.2@1918.4,1977.46 ; U2.2@1934.12,2735.5 1957.6,2735.46 1987.3,2705.86 C4.1@1987.29,2638.05 ; R8.2@2006.85,3030.76 2006.8,2922.66 v1@2075.8,2853.66 ; v1@2128.8,2863.46 MU2.1@2128.79,2917.58 ; v1(2371.12,2306.18) U6.5@2437.96,2306.16 ; v1(2371.12,2523.5) U5.3@2459.88,2523.53 ; v1(2410.49,2843.77) 2410.5,2735.46 2439.9,2706.06 C12.1@2518.76,2706.1 ; v1(2459.7,2843.77) 2479.2,2824.26 2518.8,2824.26 R11.2@2568,2824.26 ; v1@2656.6,2932.36 2656.6,3030.66 R9.2@2656.66,3030.76 ; C2.2@2715.69,2400.86 v1@2715.7,2489.46 ; v1(2735.29,2843.77) U1.22@2735.3,2872.37 ; v1(2755,2843.76) U1.21@2754.99,2872.37 ; C3.1@2794.18,2341.76 2794.4,2341.66 v1(2794.35,2312.27) ; v1@2981.4,2902.86 2981.4,3099.66 3010.9,3129.16 SW2.1@3106.8,3129.16 ; v1@3106.8,2302.46 SW1.1@3106.8,2341.76
  Top Layer w20: v1(1741.2,2391.06) 1770.7,2391.16 C6.1@1770.69,2518.06 ; U3.2@1930.17,2361.48 1957.6,2361.46 1987.3,2331.86 v1@1987.3,2302.46 ; C4.1@1987.29,2638.05 v1(2036.5,2637.06)
  Bottom Layer w10: CN2.8@2102.43,1991.36 v1@2102.4,2076.06 ; v1(2164.43,2810.5) U4.8@2209.65,2810.46 ; v1@2454.8,2046.56 CN2.6@2454.8,2101.76 ; CN2.7@2561.1,1991.36 v1@2561.1,2076.06
  other v1: 2454.78,2046.52 2102.41,2076.05 2561.09,2076.05 1987.26,2302.43 3106.75,2302.43 2715.73,2489.44 2991.19,2533.74 2966.58,2563.26 2961.67,2597.7 2981.35,2671.53 2764.82,2696.13 2843.56,2696.13 2804.19,2735.5 2764.82,2774.87 2843.56,2774.87 2075.84,2853.61 2128.81,2863.45 2384.7,2863.45 2981.36,2902.82 2656.55,2932.35
IN1: MU2.2 U1.42 | length 977.4
  Top Layer w6: v1@2178.8,2863.46 MU2.2@2178.79,2917.58 ; v1(2794.35,2568.18) U1.42@2794.4,2598.56
  Bottom Layer w6: v1@2178.8,2863.46 2203.4,2838.86 2235.3,2838.86 2279.6,2794.56 2279.6,2632.16 2307.1,2604.56 2443,2604.56 2459.7,2587.86 2459.7,2548.46 2484.3,2523.86 2710.7,2523.86 2730.4,2543.56 2769.8,2543.56 v1(2794.35,2568.18)
  other v1: 2178.81,2863.45
IN2: MU2.3 U1.39 | length 856.2
  Top Layer w6: v1@2228.8,2863.46 MU2.3@2228.79,2917.58 ; v1(2735.29,2568.18) U1.39@2735.3,2598.56
  Bottom Layer w6: v1@2228.8,2863.46 2292.4,2799.86 2292.4,2637.06 2312.1,2617.36 2449.9,2617.36 2474.5,2592.76 2474.5,2553.36 2489.2,2538.66 2705.8,2538.66 v1(2735.29,2568.18)
  other v1: 2228.81,2863.45
IN3: MU1.2 U1.28 | length 364.4
  Top Layer w6: v1@2434.7,2863.46 MU1.2@2434.7,2917.58 ; v1(2636.9,2784.76) U1.28@2667.29,2784.67
  Bottom Layer w6: v1@2434.7,2863.46 2454.4,2883.16 2499.1,2883.16 2508.9,2873.26 2508.9,2853.66 2518.8,2843.76 2607.3,2843.76 2636.9,2814.16 v1(2636.9,2784.76)
  other v1: 2434.7,2863.45
IN4: MU1.3 U1.29 | length 320.9
  Top Layer w6: v1@2484.7,2863.46 MU1.3@2484.7,2917.58 ; v1@2617.2,2765.06 U1.29@2667.3,2765.06
  Bottom Layer w6: v1@2484.7,2863.46 2484.7,2838.46 2494.2,2828.96 2602.4,2828.96 2617.2,2814.26 v1@2617.2,2765.06
  other v1: 2617.18,2765.03 2484.7,2863.45
L1_2: L1.2
LED: R12.1 U1.24 | length 883.8
  Top Layer w5.98: U1.24@2695.93,2872.37 2695.9,2676.46 v1(2705.77,2666.6) ; R12.1@2745.1,2154.96 v1@2745.1,2184.36
  Bottom Layer w5.98: v1(2705.77,2666.6) 2725.45,2666.6 2735.29,2656.76 2735.29,2607.54 2745.13,2597.7 2814.03,2597.7 2823.88,2587.86 2823.88,2558.33 2814.03,2548.49 2814.03,2204 2794.35,2184.32 v1(2745.13,2184.32)
MISO: U1.38 U4.6 | length 791.6
  Top Layer w6: v1(2164.43,2710.5) 2146.2,2710.46 2135.2,2699.46 2135.2,2648.46 2147.2,2636.46 2444.2,2636.46 2486.2,2594.46 2666.2,2594.46 2676.2,2584.46 2676.2,2568.46 2686.3,2558.36 2705.8,2558.36 2715.6,2568.16 U1.38@2715.6,2598.56
  Bottom Layer w6: v1(2164.43,2710.5) U4.6@2209.65,2710.46
MOSI: U1.36 U4.5 | length 579.2
  Top Layer w6: v1(2164.43,2660.5) 2438.2,2660.46 2492.2,2606.46 2616.1,2606.46 2636.9,2627.26 U1.36@2667.3,2627.26
  Bottom Layer w6: v1(2164.43,2660.5) U4.5@2209.65,2660.46
MR1_2: MU1.7
MU2_7: MU2.7
OUT1: MU2.8 pad.1 pad.5@2184.11,3404.79
OUT2: MU2.6 pad.2 pad.5@2282.53,3404.79
OUT3: MU1.8 pad.3 pad.5@2380.96,3404.79
OUT4: MU1.6 pad.4 pad.5@2479.39,3404.79
PGND: CN1.2 MC1.1 MC2.1 MC3.1 MC4.1 MC5.1 MC6.1 MC7.1 MC8.1 MD2.2 MU1.9 MU2.9 R14.1 | length 39.4
  Top Layer w10: R14.1@1849.35,2863.46 v1(1849.5,2824.06)
  other v1: 1526.62,2942.2 1936.08,2942.2 1526.62,2966.8 1936.08,2966.81 1526.62,2996.33 1936.08,2996.34 2159.5,3001.25 2243.16,3001.25 2415.41,3001.25 2503.99,3001.25 1526.62,3020.94 1936.08,3020.94 2202.79,3031.28 2458.7,3031.28 2159.5,3060.31 2248.09,3060.31 2415.41,3060.31 2503.99,3060.31 1526.62,3089.83 1526.62,3114.43 1526.62,3143.96 1526.62,3168.57 2292.38,3217.79 2548.28,3217.79 2292.38,3237.47 2548.28,3237.47 2292.38,3257.16 2548.28,3257.16 1928.21,3267 2725.45,3267 2292.38,3276.84 2548.28,3276.84 1928.21,3291.61 2725.45,3291.6 1928.21,3321.14 2725.45,3321.13 1928.21,3345.74 2725.45,3345.74 1928.21,3414.63 2725.45,3414.63 1928.21,3439.24 2725.45,3439.23 1928.21,3468.77 2725.45,3468.76 1928.21,3493.37 2725.45,3493.37
R12_2: LED1.1 R12.2 | length 58.7
  Top Layer w6: LED1.1@2745.1,2036.86 R12.2@2745.13,2095.61
R13_2: LED2.1 R13.2 | length 58.7
  Top Layer w10: LED2.1@1918.4,2036.86 R13.2@1918.36,2095.61
R16_1: R16.1 U5.2 | length 114
  Top Layer w6: R16.1@2144.9,2459.86 2144.9,2509.26 2159.1,2523.46 U5.2@2203.58,2523.53
S$1051: 
S$93339: 
S$93341: 
S$93344: 
S$94575: 
S$141632: 
S$187272: 
SCK: U1.35 U4.7 | length 656.1
  Top Layer w6: v1(2164.43,2760.5) 2184.1,2760.06 2194,2750.26 2194,2686.26 2205,2675.26 2441.4,2675.26 2498.2,2618.46 2608.4,2618.46 2636.9,2646.96 U1.35@2667.3,2646.96
  Bottom Layer w6: v1(2164.43,2760.5) U4.7@2209.65,2760.46
U1_2: L1.1 U1.2 | length 223.1
  Top Layer w10: U1.2@2941.1,2646.96 2971.5,2646.96 ; 2971.51,2646.92 cw(c2971.51,2627.23) 2991.2,2627.23 2991.2,2578.02 ccw(c3016,2578.02) 3016,2553.22 ; 3016,2553.26 L1.1@3089.6,2553.26
U1_7: U1.7
U2_1: C5.2 U2.1 | length 71.6
  Top Layer w10: C5.2@1908.6,2637.06 1908.6,2672.66 U2.1@1934.12,2698.11
U2_3: R4.2 R6.1 U2.3 | length 303.3
  Top Layer w10: R4.2@1849.35,2582.96 1879,2612.56 1879,2755.16 1896.7,2772.86 U2.3@1934.12,2772.9 1941.9,2765.16 R6.1@1987.3,2765.16
U2_4: R5.2 U2.4 | length 56.4
  Top Layer w10: R5.2@1770.7,2765.16 1816.1,2765.16 U2.4@1823.87,2772.9
U2_6: C5.1 L2.1 U2.6 | length 237.3
  Top Layer w15: U2.6@1823.87,2698.11 1849.3,2672.66 1849.3,2637.06 1810.1,2597.86 1810.1,2558.36 1838.5,2529.96 L2.1@1838.53,2499.26
U6_2: R19.1 U6.2 | length 82.8
  Top Layer w6: R19.1@2144.86,2400.86 2150.2,2406.16 U6.2@2225.5,2406.16
U6_3: R20.1 U6.3 | length 86.6
  Top Layer w6: R20.1@2144.86,2341.76 2159.3,2356.16 U6.3@2225.5,2356.16
VBUS_S: C9.2 R7.2 R8.1 U1.5 | length 1376.2
  Top Layer w6: v1(2066,2932.36) C9.2@2066.09,2981.56 ; v1(2892.77,2705.97) U1.5@2941.1,2705.96
  Top Layer w10: C9.2@2066.09,2981.56 R7.2@2066.1,3079.96
  Bottom Layer w6: v1(2066,2932.36) 2617.2,2932.36 2641.8,2907.76 2784.5,2907.76 2853.4,2976.66 2912.5,2976.66 2932.1,2956.96 2932.1,2745.36 v1(2892.77,2705.97)
VM: MC1.2 MC2.2 MC3.2 MC4.2 MC5.2 MC6.2 MC7.2 MC8.2 MD1.2 MD2.1 MU1.5 MU2.5 R7.1 | length 39.4
  Top Layer w10: R7.1@2006.85,3079.96 v1(2006.81,3119.36)
  other v1: 1583.72,2464.83 1608.32,2464.83 1637.85,2464.83 1662.46,2464.83 1583.72,2568.18 1608.32,2568.18 1637.85,2568.18 1662.46,2568.18 1642.77,2942.2 1733.31,2942.2 1642.77,2966.81 1733.31,2966.81 1642.77,2996.34 1733.31,2996.34 1642.77,3020.94 1733.31,3020.94 1642.77,3089.83 1733.31,3089.83 2302.22,3089.83 2558.13,3094.75 1642.77,3114.44 1733.31,3114.44 2302.22,3114.44 2558.13,3119.36 2302.22,3139.05 1642.77,3143.97 1733.31,3143.97 2558.13,3143.97 2302.22,3163.65 1642.77,3168.57 1733.31,3168.57 2558.13,3168.57 1977.42,3267 2676.24,3267 1977.42,3291.6 2676.24,3291.61 1977.42,3321.13 2676.24,3321.14 1977.42,3345.74 2676.24,3345.74 1977.42,3414.63 2676.24,3414.63 1977.42,3439.23 2676.24,3439.24 1977.42,3468.76 2676.24,3468.77 1977.42,3493.37 2676.24,3493.37
VM_IN: C6.2 CN1.1 MD1.1 R5.1 U2.5 | length 447.9
  Top Layer w10: v1@1662.5,2376.26 1716.6,2430.36 1716.6,2597.66 1756.9,2638.06 C6.2@1770.69,2638.06 1770.7,2705.86 1800.4,2735.46 U2.5@1823.87,2735.5
  other v1: 1583.72,2376.25 1608.32,2376.25 1637.85,2376.25 1662.46,2376.25
pads on no net: U1.6 U1.10 U1.11 U1.12 U1.13 U1.20 U1.25 U1.26 U1.27 U1.30 U1.31 U1.32 U1.33 U1.44 U1.45 U1.47 U1.48 U3.4 U4.3

## Polygon pours and split planes (outlines as drawn)
VM_IN on Bottom Layer "Bottom Layer-VM_IN" (solid, pour order 0): 2105.37,2253.22 2125.05,2233.53 2125.05,2125.26 2105.37,2105.58 1918.36,2105.58 1770.72,2253.22 1524.66,2253.22 1504.97,2272.9 1504.97,2391.01 1524.66,2410.7 1760.88,2410.7 1790.41,2381.17 1888.83,2381.17 2016.79,2253.22
PGND on Bottom Layer "Bottom Layer-PGND" (solid, pour order 2): 2144.74,2184.32 2164.42,2164.63 2213.64,2164.63 2233.32,2184.32 2233.32,2361.48 2213.64,2381.17 2134.9,2381.17 1997.1,2518.97 1997.1,2892.98 2056.16,2952.03 2794.34,2952.03 2814.03,2971.72 2814.03,3542.59 2794.34,3562.27 2735.29,3562.27 2715.61,3542.59 2715.61,3079.99 2686.08,3050.46 2518.75,3050.46 2489.23,3079.99 2489.23,3168.57 2518.76,3198.1 2558.12,3198.1 2577.81,3217.78 2577.81,3286.68 2558.12,3306.37 2154.58,3306.37 2134.9,3286.68 2134.9,3227.63 2154.58,3207.94 2312.06,3207.94 2341.59,3178.41 2341.59,3079.99 2312.06,3050.46 1869.15,3050.46 1849.46,3030.78 1849.46,2902.82 1760.88,2814.24 1760.88,2450.07 1810.09,2400.85 1898.68,2400.85 2026.63,2272.9 2105.37,2272.9 2115.21,2272.9 2144.74,2243.37
VM on Bottom Layer "Bottom Layer-VM" (solid, pour order 4): 1504.97,2479.59 1504.97,2450.07 1524.66,2430.38 1721.51,2430.38 1741.2,2450.07 1741.2,2824.08 1829.78,2912.66 1829.78,3040.62 1859.31,3070.15 2302.22,3070.15 2321.9,3089.83 2321.9,3168.57 2302.22,3188.26 2144.74,3188.26 2115.21,3217.78 2115.21,3365.42 2134.9,3385.11 2577.81,3385.11 2597.49,3365.42 2597.49,3207.94 2567.97,3178.41 2528.6,3178.41 2508.91,3158.73 2508.91,3089.83 2528.6,3070.15 2676.24,3070.15 2695.92,3089.83 2695.92,3542.59 2676.24,3562.27 2548.28,3562.27 2548.28,3483.53 2115.21,3483.53 2115.21,3562.27 1977.42,3562.27 1957.73,3542.59 1957.73,3217.78 1938.05,3198.1 1642.77,3198.1 1623.09,3178.41 1623.09,2932.35 1504.97,2814.24
GND on Bottom Layer "Bottom Layer-GND" (solid, pour order 6): 3001.04,3641.01 3079.78,3641.01 3079.78,3562.27 3158.52,3562.27 3158.52,1908.73 1504.97,1908.73 1504.97,3562.27 3001.04,3562.27
GND on Mid-Layer 2 "Mid-Layer 2-GND" (solid, pour order 8): 1662.46,1908.72 1504.98,2066.21 1504.98,2381.17 1544.35,2420.54 1977.42,2420.54 2016.79,2459.91 2016.79,2696.13 2056.16,2735.5 2056.16,2892.98 2095.53,2932.35 3119.15,2932.35 3158.52,2892.98 3158.52,2066.21 3001.04,1908.72
3.3V_ESP on Mid-Layer 1 "Mid-Layer 1-3.3V_ESP" (solid, pour order 10): 2607.34,2932.35 3001.04,2932.35 3001.04,2538.65 2607.34,2538.65
PGND on Mid-Layer 1 "Mid-Layer 1-PGND" (solid, pour order 12): 2804.19,3562.27 2843.56,3522.9 2843.56,3011.09 2804.19,2971.72 2056.16,2971.72 2016.79,2932.35 2016.79,2774.87 1977.42,2735.5 1544.35,2735.5 1504.97,2774.87 1504.97,3404.79 1662.46,3562.27 2056.16,3562.27
3.3V on Mid-Layer 1 "Mid-Layer 1-3.3V" (solid, pour order 14): 2016.79,2696.13 2056.16,2735.5 2056.16,2892.98 2095.53,2932.35 2528.6,2932.35 2567.97,2892.98 2567.97,2538.65 2607.34,2499.28 2961.67,2499.28 3001.04,2459.91 3001.04,2381.17 3040.41,2341.8 3119.15,2341.8 3158.52,2302.43 3158.52,2066.21 3001.04,1908.72 1662.46,1908.72 1504.98,2066.21 1504.98,2381.17 1544.35,2420.54 1977.42,2420.54 2016.79,2459.91
GND on Top Layer "Top Layer-GND" (solid, pour order 16): 1504.97,3562.27 1504.97,1908.73 3158.52,1908.73 3158.52,3641.01 3079.78,3641.01 3079.78,3562.27

## Keep-outs
Keep-Out Layer:
  lines w10: 1505,2066.26 1662.5,1908.76 3001.1,1908.76 3158.5,2066.26 3158.5,2617.36 3158.5,2853.56 3158.5,3404.76 3001,3562.26 2548.3,3562.26 2548.3,3483.56 2115.2,3483.56 2115.2,3562.26 1662.5,3562.26 1505,3404.76 1505,2066.26